# Altium PCB door_lock_pcb.PcbDoc
Units mil, origin at the board's own origin, x right, y up, seen from the top; angles counter-clockwise.
Board outline 6000 x 4000 mil, 2 copper layers (Top Layer, Bottom Layer); 31 components, 30 nets, 105 pads, 0 vias.
Unrouted connection lines stored in the file: 72.
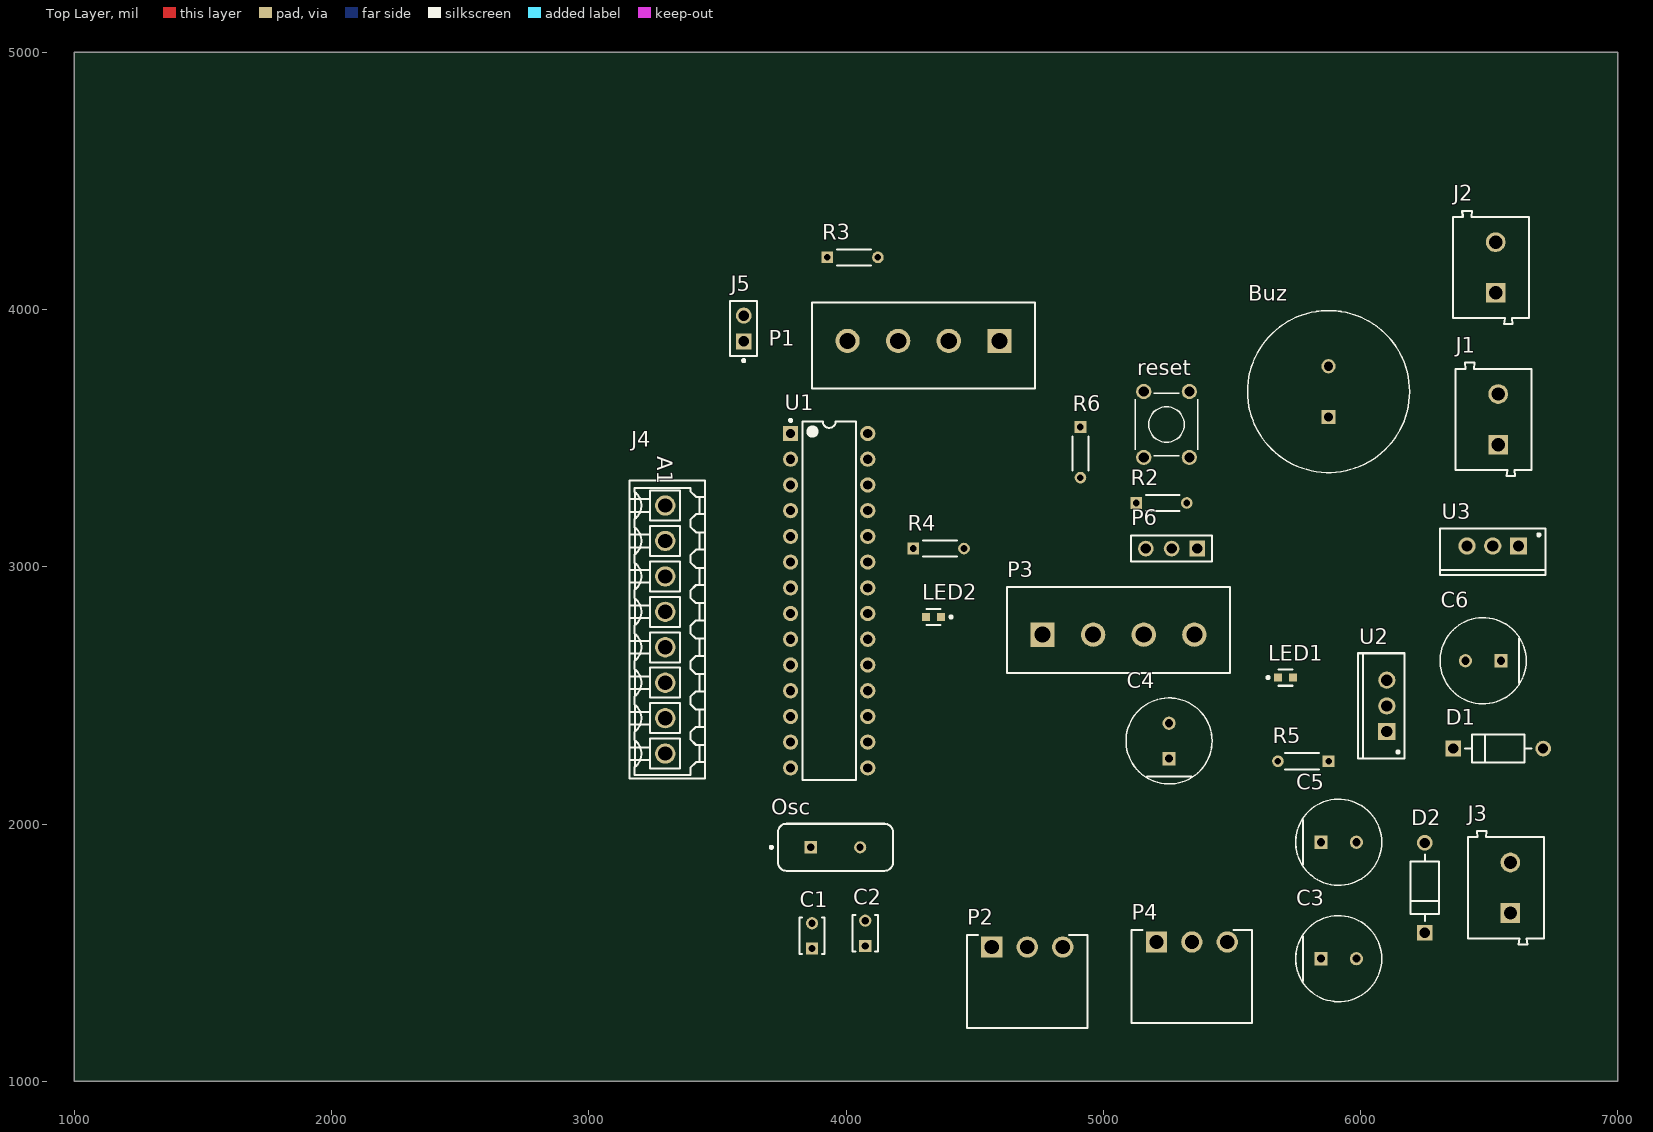
[diagram p0: Top Layer view]
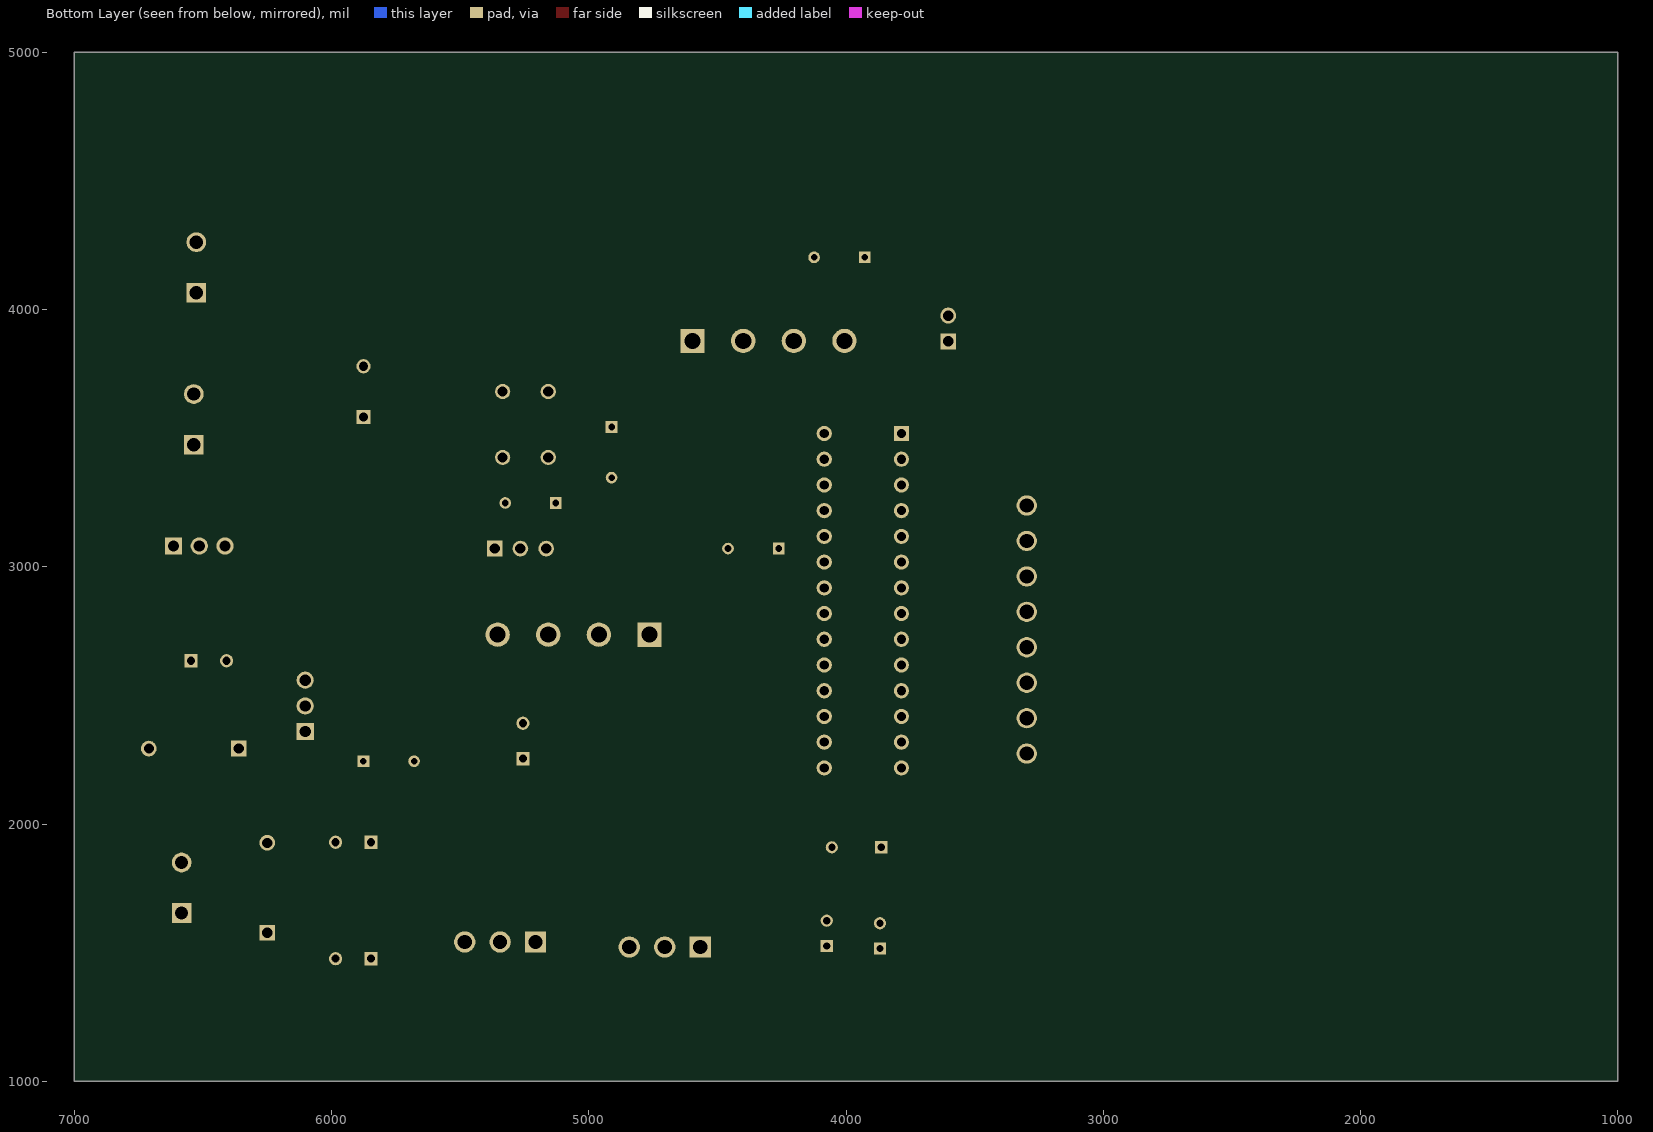
[diagram p1: Bottom Layer view, seen from below]

## Layer stack, top to bottom
Top Solder: solder mask 0.4, Solder Resist, Dk 3.5
Top Layer: signal copper 1.4
Dielectric 1: dielectric 12.6, FR-4, Dk 4.8
Bottom Layer: signal copper 1.4
Bottom Solder: solder mask 0.4, Solder Resist, Dk 3.5

## Board outline
1000,1000 7000,1000 7000,5000 1000,5000

## Design rules (kind name [scope] priority, off if disabled: settings)
Clearance [All] p1: gap=10 ignorepadtopadclearanceinfootprint=FALSE except(0: Arc-Hole Track-Hole SMDPad-Hole THPad-Hole Via-Hole Fill-Hole Poly-Hole Region-Hole Text-Hole)
PolygonConnect [All] p1: connectstyle=Relief reliefconductorwidth=10 reliefentries=4 polygonreliefangle="90 Angle" airgapwidth=10
RoutingVias [All] p1: holewidth=28 width=50 viastyle="Through Hole" minholewidth=28 minwidth=50 maxholewidth=28 maxwidth=50
SolderMaskExpansion [All] p1: expansion=4 istentingtop=FALSE
Width [All] p1: maxlimit=10 minlimit=10 preferedwidth=10
30 further rules are at their usual default settings.

## Components (designator, comment, footprint, x,y, rotation, side; value= is the part's Value field where it differs from the comment)
Buz "SD1614TT-B3M" FP-SD1614TT-B3M-MFG 5875.98,3681.1 r0 top
C1 "RCE5C2A220J0DBH03A" FP-RCE0DB-MFG 3868.11,1564.96 r90 top
C2 "RCE5C2A220J0DBH03A" FP-RCE0DB-MFG 4074.8,1574.8 r90 top
C3 "EEUFC1V151" FP-RAD-TH-D_8_0_5-L_11_5-MFG 5915.35,1476.38 r0 top
C4 "EEUFC1V151" FP-RAD-TH-D_8_0_5-L_11_5-MFG 5255.91,2322.83 r90 top
C5 "EEUFC1V151" FP-RAD-TH-D_8_0_5-L_11_5-MFG 5915.35,1929.13 r0 top
C6 "EEUFC1V151" FP-RAD-TH-D_8_0_5-L_11_5-MFG 6477.05,2634.61 r180 top
D1 "1N4007" FP-1N4007-MFG 6535.43,2293.31 r0 top value=15pF
D2 "1N4007" FP-1N4007-MFG 6250,1751.97 r90 top value=15pF
J1 "691102710002" 691102710002 6517.72,3572.83 r90 top
J2 "691102710002" 691102710002 6507.87,4163.39 r90 top
J3 "691102710002" 691102710002 6564.96,1751.97 r90 top
J4 "1842380000" SL_SMT_3_5_180G_08 3305.91,2755.91 r270 top
J5 "TSW-102-07-F-S" FP-TSW-102-07-F-S-MFG 3602.36,3926.38 r90 top
LED1 "LG L29K-G2J1-24-Z" FP-LG_L29K-MFG 5708.66,2568.9 r0 top
LED2 "LG L29K-G2J1-24-Z" FP-LG_L29K-MFG 4340.55,2805.12 r180 top
Osc "FOXSLF/160-20" FOX-FOXSLF160-20 3959.06,1909.45 r0 top
P1 "691311700104" 691311700104 4301.18,3860.24 r180 top
P2 "691322110003" 691322110003 4704.72,1387.8 r0 top
P3 "691311700104" 691311700104 5059.06,2753.94 r0 top
P4 "691322110003" 691322110003 5344.49,1407.48 r0 top
P6 "TSW-103-07-G-S" SMTC-TSW-103-07-X-S 5365.75,3070.87 r180 top
R2 "MRS16000C2002FCT00" FP-MRS1600-MFG 5226.38,3248.03 r0 top
R3 "MRS16000C2002FCT00" FP-MRS1600-MFG 4025.59,4202.76 r0 top
R4 "MRS16000C2002FCT00" FP-MRS1600-MFG 4360.24,3070.87 r0 top
R5 "MRS16000C2002FCT00" FP-MRS1600-MFG 5777.56,2244.09 r180 top
R6 "MRS16000C2002FCT00" FP-MRS1600-MFG 4911.42,3444.88 r270 top
reset "430156043726" 430156043726 5246.06,3553.15 r90 top
U1 "ATmega328-PU" 28P3 3934.65,2868.11 r0 top
U2 "L7805CV" TO220 6102.36,2459.05 r90 top
U3 "L7805CV" TO220 6514.17,3080.71 r180 top

## Footprints (in the part's own frame and the unit in brackets; to place one, negate y for a bottom-side part, rotate by r counter-clockwise, add the part's x,y. Pads: shape width x height; smd on the part's side, far side on the other; paste and mask are expansions set on the pad)
28P3 [mm] "28-Pin Plastic Dual In-Line Package (PDIP)"
  rect 1.5x1.5 hole 0.9: 1(-3.81,16.51)
  round 1.5 hole 0.9: 2(-3.81,13.97) 3(-3.81,11.43) 4(-3.81,8.89) 5(-3.81,6.35) 6(-3.81,3.81) 7(-3.81,1.27) 8(-3.81,-1.27) 9(-3.81,-3.81) 10(-3.81,-6.35) 11(-3.81,-8.89) 12(-3.81,-11.43) 13(-3.81,-13.97) 14(-3.81,-16.51) 15(3.81,-16.51) 16(3.81,-13.97) 17(3.81,-11.43) 18(3.81,-8.89) 19(3.81,-6.35) 20(3.81,-3.81) 21(3.81,-1.27) 22(3.81,1.27) 23(3.81,3.81) 24(3.81,6.35) 25(3.81,8.89) 26(3.81,11.43) 27(3.81,13.97) 28(3.81,16.51)
  silkscreen extent -3.93,-17.7 2.65,17.93, body extent -3.6,-17.65 3.6,17.65, height 4.58
430156043726 [mm] "6*6mm vertical type, THT, height 4.3mm, white actuator, 260gf, Bulk"
  round 1.5 hole 1: 1(-3.25,2.25) 2(-3.25,-2.25) 3(3.25,2.25) 4(3.25,-2.25)
  silkscreen extent -3.1,-3.1 3.1,3.1, body extent -3.95,-3.1 3.95,3.1, height 4.31
691102710002 [mm] "5,00mm - modular - blue - Horizontal entry with pressure clamp - 9,9 mm height - 02p"
  rect 1.95x1.95 hole 1.3: 1(-2.5,-0.45)
  round 1.95 hole 1.3: 2(2.5,-0.45)
  silkscreen extent -5.6,-3.75 5.6,3.75, body extent -5.6,-3.75 5.6,3.75, height 9.96
691311700104 [mm] "5.00mm - PCB Vertical Closed - 04p"
  rect 2.4x2.4 hole 1.6: 1(-7.5,-0.45)
  round 2.4 hole 1.6: 2(-2.5,-0.45) 3(2.5,-0.45) 4(7.5,-0.45)
  silkscreen extent -11,-4.25 11,4.25, body extent -11,-4.25 11,4.25, height 12.1
691322110003 [mm] "Horizontal PCB Header, pitch 3.5mm, 03p"
  rect 2.1x2.1 hole 1.4: 1(-3.5,3.4)
  round 2.1 hole 1.4: 2(0,3.4) 3(3.5,3.4)
  silkscreen extent -5.95,-4.6 5.95,4.6, body extent -5.95,-4.6 5.95,4.6, height 7.3
FOX-FOXSLF160-20 [mm] "THD, 2-Leads, Body 11.35x4.65mm"
  rect 1.2x1.2 hole 0.7: 1(-2.44,0)
  round 1.2 hole 0.7: 2(2.44,0)
  silkscreen extent -6.45,-2.32 5.68,2.32, body extent -5.67,-2.32 5.68,2.33, height 3.6
FP-1N4007-MFG [mm]
  rect 1.55x1.55 hole 1 paste-1000 mask+0: 1(-4.44,0)
  round 1.55 hole 1 paste-1000 mask+0: 2(4.44,0)
  silkscreen extent -3.26,-1.4 3.26,1.4, body extent -5.32,-1.5 5.32,1.5, height 0.25
FP-LG_L29K-MFG [mm]
  rect 0.8x0.8 smd paste-1000 mask+0: 1(-0.75,0) 2(0.75,0)
  silkscreen extent -1.85,-0.8 0.7,0.8, body extent -0.85,-0.4 0.85,0.4, height 0.67
FP-MRS1600-MFG [mm]
  rect 1.15x1.15 hole 0.65 paste-1000 mask+0: 1(-2.5,0)
  round 1.15 hole 0.65 paste-1000 mask+0: 2(2.5,0)
  silkscreen extent -1.55,-0.8 1.8,0.8, body extent -3.17,-0.9 3.17,0.9, height 0.25
FP-RAD-TH-D_8_0_5-L_11_5-MFG [mm]
  rect 1.3x1.3 hole 0.8 paste-1000 mask+0: 1(-1.75,0)
  round 1.3 hole 0.8 paste-1000 mask+0: 2(1.75,0)
  silkscreen extent -4.25,-4.25 4.25,4.25, body extent -4.35,-4.35 4.35,4.35, height 0.25
FP-RCE0DB-MFG [mm]
  rect 1.2x1.2 hole 0.7 paste-1000 mask+0: 1(-1.25,0)
  round 1.2 hole 0.7 paste-1000 mask+0: 2(1.25,0)
  silkscreen extent -1.8,-1.25 1.8,1.25, body extent -1.95,-1.35 1.95,1.35, height 0.25
FP-SD1614TT-B3M-MFG [mm]
  rect 1.4x1.4 hole 0.9 paste-1000 mask+0: 1(0,-2.5)
  round 1.4 hole 0.9 paste-1000 mask+0: 2(0,2.5)
  silkscreen extent -8,-8 8,8, body extent -8.1,-8.1 8.1,8.1, height 0.25
FP-TSW-102-07-F-S-MFG [mm]
  rect 1.57x1.57 hole 1.02 paste-1000 mask+0: 1(-1.27,0)
  round 1.57 hole 1.02 paste-1000 mask+0: 2(1.27,0)
  silkscreen extent -3.3,-1.34 2.73,1.34, body extent -2.83,-1.44 2.83,1.44, height 0.25
SL_SMT_3_5_180G_08 [mm] "OMNIMATE Signal - Serie BL/SL 3.50  SL-SMT 3.50/08/180G 1.5"
  round 2 hole 1.4: A1(-12.25,-0.22) A2(-8.75,-0.22) A3(-5.25,-0.22) A4(-1.75,-0.22) A5(1.75,-0.22) A6(5.25,-0.22) A7(8.75,-0.22) A8(12.25,-0.22)
  silkscreen extent -14.7,-3.73 14.7,3.73, body extent -14.7,-3.72 14.7,3.73, height 11.06
SMTC-TSW-103-07-X-S [mm] ".025 SQ Post Terminal Strip Assembly, 1x3 Pins, Vertical, 2.54mm Pitch, Male"
  rect 1.55x1.55 hole 1.02: 1(0,0)
  round 1.55 hole 1.02: 2(2.54,0) 3(5.08,0)
  silkscreen extent -1.46,-1.27 6.54,1.27, body extent -1.27,-1.27 6.35,1.27, height 8.38
TO220 [mm] "TO, Thru-Hole, Vertical, Heatsink Mounted; 3 In-Line Leads; Pitch 2.54 mm"
  rect 1.7x1.7 hole 1.1: 1(-2.54,0)
  round 1.7 hole 1.1: 2(0,0) 3(2.54,0)
  silkscreen extent -5.2,-1.75 5.2,2.85, body extent -5.25,-1.8 5.25,2.9, height 19.7

## Part data
Buz: library part CMP-08413-000011-1, "AUDIO MAGNETIC XDCR 6-16V TH", Frequency=2.048kHz, Max Operating Temperature=85°C, Max Supply Current=100mA, Min Operating Temperature=-40°C, Operating Supply Voltage=15V, Package Quantity=240, Voltage Rating=12V, Diameter=16mm, Height=11mm, Height - Seated (Max)=0.551inch, Lead Free="Lead Free", Mount="Through Hole", Operating Supply Current=100mA, Packaging=Bulk, Sensing Method=Magnetic, Series=SD, Termination="PC Pins", Washable=No
C1 C2: library part CMP-06035-047347-1, "Cap Ceramic 22pF 100V C0G ±5% Radial 2.5mm +125°C Ammo Pack", Capacitance=22pF, Case/Package=Radial, Dielectric=C0G, Max Operating Temperature=125°C, Min Operating Temperature=-55°C, Package Quantity=2000, Ratings=AEC-Q200, Resistor Type=Ceramic, Tolerance=5%, Voltage=100V, Depth=2.5mm, Height=3.5mm, Height - Seated (Max)=0.138inch, Lead Diameter=0.5mm, Lead Pitch=0.098inch, Lead/Base Style=Straight, Length=3.6mm, Mount="Through Hole", Packaging="Tape and Reel", Termination=Radial, Voltage Rating=100V, Voltage Rating (DC)=100V, Width=0.098inch
C3 C5: library part CMP-05427-001656-1, "Aluminum Electrolytic Capacitors (Radial Lead Type) AEC-Q200 Qualified 150uF ±20% 35V", Capacitance=1uF, Case/Package=Radial, Dielectric Material=Aluminium, ESR (Equivalent Series Resistance)=117mR, Leakage Current=3uA, Max Operating Temperature=105°C, Min Operating Temperature=-55°C, Package Quantity=200, Ratings=AEC-Q200, Ripple Current=555mA, Tolerance=20%, Voltage=35V, Construction=RADIAL, Contact Plating=Tin, Diameter=8mm, Height=11.5mm, Height - Seated (Max)=0.453inch, Impedance=117mR, Lead Diameter=0.6mm, Lead Free="Lead Free", Lead Pitch=3.5mm, Length=11mm, Life (Hours)=2000Hour, Mount="Through Hole", Packaging=Bulk, Polarity=Polar, Radiation Hardening=No, REACH SVHC="No SVHC", RoHS Compliant=Yes, Series=FC, Size=11.5mm, Termination=Radial, Voltage Rating=35V, Voltage Rating (DC)=35V
C4 C6: library part CMP-05427-001656-1, "Aluminum Electrolytic Capacitors (Radial Lead Type) AEC-Q200 Qualified 150uF ±20% 35V", Capacitance=10uF, Case/Package=Radial, Dielectric Material=Aluminium, ESR (Equivalent Series Resistance)=117mR, Leakage Current=3uA, Max Operating Temperature=105°C, Min Operating Temperature=-55°C, Package Quantity=200, Ratings=AEC-Q200, Ripple Current=555mA, Tolerance=20%, Voltage=35V, Construction=RADIAL, Contact Plating=Tin, Diameter=8mm, Height=11.5mm, Height - Seated (Max)=0.453inch, Impedance=117mR, Lead Diameter=0.6mm, Lead Free="Lead Free", Lead Pitch=3.5mm, Length=11mm, Life (Hours)=2000Hour, Mount="Through Hole", Packaging=Bulk, Polarity=Polar, Radiation Hardening=No, REACH SVHC="No SVHC", RoHS Compliant=Yes, Series=FC, Size=11.5mm, Termination=Radial, Voltage Rating=35V, Voltage Rating (DC)=35V
D1 D2: library part CMP-123542-000001-1, "Rectifier diode 1000 V 1 A DO-41, ,", Capacitance=15pF, Forward Current=1A, Manufacturer=Diotec, Max Junction Temp=+175°C, Max Repetitive Reverse Voltage=1000V, Max Surge Forward Current=27A, Peak Reverse Current=5uA, Temperature="-50°C to +175°C", Temperature Range Low=-50°C, Automotive=No, Category=Diode, ComponentLink2Description=Datasheet, ComponentLink2URL=https://datasheet.octopart.com/1N4007-Diotec-datasheet-62346875.pdf, Device Class L1="Discrete Semiconductors", Device Class L2=Diodes, Device Class L3="Rectifier Diodes", Height=2.8mm, Ipc Land Pattern Name=DIOAD888W100L520D280, Lead Free=Yes, Manufacturer Part Number=1N4007, Octopart=https://octopart.com/1n4007-diotec-4040411, Package=1N4007, Reverse Voltage=1000V, RoHS=TRUE, Temperature Range High=+175°C
J1 J2 J3: library part CMP-1502-03258-1, "Series 102 - 5.00 mm Horizontal Entry Modular with Pressure Clamp WR-TBL, 2 pin", Manufacturer="Wurth Elektronik", Operating Temperature=-40to105degC, Datasheet URL=http://katalog.we-online.de/em/datasheet/6911027100xx.pdf, Manufacturer URL=http://www.we-online.de, Mounting Technology=THT, Package Reference=691102710002, Packaging=Box, Part Number=691102710002, Pin Number=2, Pitch=5.00mm, Publisher=WurthElektronik
J4: library part CMP-1559-01143-1, "OMNIMATE Signal - series BL/SL 3.50", Colour=Black, Manufacturer=Weidmueller, Rated_current_min_no_of_poles_TU_20_deg_C="15 A", Rated_current_use_group_B_UL_1059="10 A", Rated_voltage_for_surge_voltage_class_pollution_degree_II_2="320 V", Rated_voltage_use_group_B_UL_1059="300 V", UL_94_flammability_rating=V-0, ComponentLink1Description="Manufacturer URL", ComponentLink1URL=http://www.weidmueller.com/, ComponentLink2Description="URL Link1", ComponentLink2URL=http://catalog.weidmueller.com/catalog/Start.do?localeId=en&ObjectID=1842380000, Contact_surface=tinned, Insulating_material="LCP GF", Mounting_onto_the_PCB="Reflow solder connection", No_of_poles=8, Outgoing_elbow=180°, PackageReference=SL_SMT_3_5_180G_08, Packaging=Box, PartNumber=1842380000, Pitch_inch="0.138 inch", Pitch_mm="3.5 mm", Qty="50 PCS", Revision=V1, Short_text_for_material="SL-SMT 3.50/08/180G 3.2SN BK BX", Side_termination_characteristic="closed side", Solder_pin_length_mm="3.2 mm"
J5: library part CMP-02766-001458-1, "CONN HEADER VERT 2POS 2.54MM", Color=Black, Flammability Rating="UL94 V-0", Max Current Rating=7.6A, Max Operating Temperature=125°C, Max Voltage Rating (AC)=550V, Min Operating Temperature=-55°C, Package Quantity=1, Connector Type=Header, Contact Finish - Mating=GOLD, Contact Material=Bronze, Contact Mating Length=0.23inch, Contact Plating=Gold, Contact Shape=Square, Contact Type="Male Pin", Depth=2.54mm, Fastening Type=Pull, Gender=Male, Housing Color=Black, Housing Material=Polyester, Insulation Color=Black, Insulation Material=PBT, Length=5.08mm, Mount="Through Hole", Number of Contacts=2, Number of Positions=2, Number of Rows=1, Orientation=Straight, Packaging=Bulk, Pitch=2.54mm, Radiation Hardening=No, REACH SVHC="No SVHC", RoHS Compliant=Yes, Series=TSW, Termination=Solder
LED1 LED2: library part CMP-62016-000024-1, "LED GREEN DIFFUSED 0603 SMD", Case Code (Imperial)=0603, Case Code (Metric)=1608, Color=Green, Forward Current=20mA, Forward Voltage=2.2V, Lens Color=White, Max Operating Temperature=100°C, Min Operating Temperature=-40°C, Package Quantity=5000, Reverse Voltage=12V, Test Current=2mA, Case/Package=0603, Depth=0.8mm, Dominant Wavelength=570nm, Height=0.65mm, Illumination Color=Green, Length=1.3mm, Lens Size=0.8mm, Lens Style=Flat, Lens Transparency=Diffused, Luminous Flux=0.012lm, Luminous Intensity=5.6mcd, Mount="Surface Mount", Number of Elements=1, Number of LEDs=1, Number of Pins=2, Packaging="Tape and Reel", Radiation Hardening=No, Viewing Angle=160°, Width=0.8mm
Osc: library part CMP-1749-00003-1, "Resistance Weld Thru-Hole Crystal, 16 MHz, -20 to 70 degC, 2-Pin THD, RoHS, Bulk", Case\Package=Axial, Max Operating Temperature="155 degC", Min Operating Temperature="-55 degC", Package Quantity=200, Power Rating="250 mW", Resistance="221 kohm", Tolerance=1%, Voltage Rating="250 V", ComponentLink1Description="Manufacturer URL", ComponentLink1URL=http://www.foxonline.com/, ComponentLink2Description=Datasheet, ComponentLink2URL=http://www.foxonline.com/pdfs/hc49slf.pdf, DatasheetVersion=Mar-15, Length="0.248 inch", Mount="Through Hole", PackageDescription="2-Pin Through Hole Device, Body 11.35 x 4.65 mm", PackageReference=FOXSLF160-20, Packaging=Bulk, RoHSCompliant=true
P1 P3: library part CMP-1502-02035-1, "Serie 3117 - 5.00mm Close Vertical PCB Header WR-TBL, 4 pin", Manufacturer="Wurth Elektronik", Operating Temperature=-40to105degC, Datasheet URL=http://katalog.we-online.de/em/datasheet/6913117001xx.pdf, Gender=Male, Manufacturer URL=http://www.we-online.de, Mounting Technology=THT, Package Reference=691311700104, Packaging=Box, Part Number=691311700104, Pin Number=4, Pitch=5.00mm, Publisher=WurthElektronik
P2 P4: library part CMP-1502-01792-1, "Serie 3221 - 3.50mm Horizontal PCB Header WR-TBL, 3 pin", Manufacturer="Wurth Elektronik", Operating Temperature=-40to105degC, Datasheet URL=http://katalog.we-online.de/em/datasheet/6913221100xx.pdf, Gender=Male, Manufacturer URL=http://www.we-online.de, Mounting Technology=THT, Package Reference=691322110003, Packaging=Box, Part Number=691322110003, Pin Number=3, Pitch=3.50mm, Publisher=WurthElektronik
P6: library part CMP-1024-00333-1, "0.025\" SQ Post Header, Through-hole, Vertical, -55 to 125 degC, 2.54 mm Pitch, 3-Pin, Male, RoHS", Manufacturer=Samtec, Temperature Range="-55 to 125 degC", ComponentLink1Description="Manufacturer URL", ComponentLink1URL=http://www.samtec.com, ComponentLink2Description=Datasheet, ComponentLink2URL=http://www.samtec.com/documents/webfiles/pdf/TSW_TH.PDF, ComponentLink3Description="Package Specification", ComponentLink3URL=http://www.samtec.com/documents/webfiles/cpdf/TSW-XXX-XX-XXX-X-XX-XXX-MKT.pdf, DatasheetVersion=F-214, Mounting Technology=Through-hole, Orientation=Vertical, PackageDescription=".025[0.64] SQ. Post Terminal Strip Assembly", PackageReference=TSW-103-07-X-S, PackageVersion="DM, 8/1988", PartNumber=TSW-103-07-G-S, Pitch="2.54 mm", RoHS=True
R2 R3: library part CMP-02408-000019-1, "RES 20K OHM 0.4W 1% AXIAL", Case/Package=Conformal, Max Operating Temperature=155°C, Max Power Dissipation=400mW, Min Operating Temperature=-55°C, Resistance=10k, Resistor Type="Metal Film", Temperature Coefficient=50ppm/°C, Tolerance=1%, Construction=Cylindrical, Contact Plating=Tin, Diameter=1.6mm, Length=3.6mm, Military Standard=Not, Mount="Through Hole", Number of Terminations=2, Packaging="Tape and Reel", Power Rating=400mW, Radiation Hardening=No, RoHS Compliant=Yes, Series=MRS16, Technology="THIN FILM", Termination=Axial
R4 R5 R6: library part CMP-02408-000019-1, "RES 20K OHM 0.4W 1% AXIAL", Case/Package=Conformal, Max Operating Temperature=155°C, Max Power Dissipation=400mW, Min Operating Temperature=-55°C, Resistance=1k, Resistor Type="Metal Film", Temperature Coefficient=50ppm/°C, Tolerance=1%, Construction=Cylindrical, Contact Plating=Tin, Diameter=1.6mm, Length=3.6mm, Military Standard=Not, Mount="Through Hole", Number of Terminations=2, Packaging="Tape and Reel", Power Rating=400mW, Radiation Hardening=No, RoHS Compliant=Yes, Series=MRS16, Technology="THIN FILM", Termination=Axial
reset: library part CMP-1453-00001-1, "WS-TATV THT Tact Switch 6X6 mm", Manufacturer="Wuerth Elektronik", ComponentLink1Description="Manufacturer URL", ComponentLink1URL=http://www.we-online.com, ComponentLink2Description=Datasheet, ComponentLink2URL=http://katalog.we-online.de/em/datasheet/4301x6.pdf, NoPins=04, PackageReference=430156043726, PartNumber=430156043726
U1: library part CMP-0095-00015-2, "8-bit AVR Microcontroller, 32KB Flash, 1KB EEPROM, 2KB SRAM, 28-pin PDIP, Industrial Grade (-40°C to 85°C)", ComponentLink1Description="Manufacturer URL", ComponentLink1URL=http://www.atmel.com/, ComponentLink2Description="ATmega48A/48PA/88A/88PA/168A/168PA/328/328P Datasheet", ComponentLink2URL=http://www.atmel.com/dyn/resources/prod_documents/8271.pdf, ComponentLink3Description="ATmega48A/48PA/88A/88PA/168A/168PA/328/328P Summary", ComponentLink3URL=http://www.atmel.com/dyn/resources/prod_documents/8271S.pdf, DatasheetVersion="revD, May-2011", PackageDescription="28-lead (0.300\"/7.62mm Wide) Plastic Dual Inline Package (PDIP)", PackageReference=28P3, PackageVersion="revB, Sep-2001", RevisionNote="DatasheetVersion updated. URLs added."
U2 U3: library part CMP-0244-00483-1, "Positive Voltage Regulator, 5V, 3-Pin TO-220", ComponentLink1Description="Manufacturer URL", ComponentLink1URL=http://www.st.com, ComponentLink2Description=Datasheet, ComponentLink2URL=http://www.st.com/internet/com/TECHNICAL_RESOURCES/TECHNICAL_LITERATURE/DATASHEET/CD00000444.pdf, ComponentLink3Description="Package Specification", ComponentLink3URL=http://www.st.com/internet/com/TECHNICAL_RESOURCES/TECHNICAL_LITERATURE/PACKAGE_INFORMATION/CD00004649.pdf, DatasheetVersion=16/11/2011, PackageDescription="TO, Thru-Hole, Vertical, Heatsink Mounted; 3 In-Line Leads; Pitch 2.54 mm", PackageReference=TO220, PackageVersion=ver3.0

## Nets (pads, with @x,y where several pads share a name; then routed paths per layer and width w, separated by ;. In a path a pad name is that pad's centre, name@x,y a point inside that pad or via, vN(x,y) a via of type N, cw(c..) or ccw(c..) an arc to the next point about the centre after c; other vN are vias at no path point)
GND: Buz.2 C1.2 C2.2 C3.1 C4.1 C5.1 C6.1 J1.1 J2.1 J3.1 J5.1 P1.4 P2.1 P3.3 P4.1 P6.3 R4.1 R5.1 reset.2 reset.4 U1.8 U1.22 U2.2 U3.2
NetBuz_1: Buz.1 R6.1
NetC1_1: C1.1 Osc.1 U1.10
NetC2_1: C2.1 Osc.2 U1.9
NetC3_2: C3.2 D1.1 D2.1 U2.1
NetC5_2: C5.2 D1.2 J1.2 U3.1
NetC6_2: C6.2 J2.2 U3.3
NetD2_2: D2.2 J3.2
NetJ4_A1: J4.A1 U1.4
NetJ4_A2: J4.A2 U1.5
NetJ4_A3: J4.A3 U1.6
NetJ4_A4: J4.A4 U1.11
NetJ4_A5: J4.A5 U1.12
NetJ4_A6: J4.A6 U1.13
NetJ4_A7: J4.A7 U1.23
NetJ4_A8: J4.A8 U1.24
NetJ5_2: J5.2 R3.1 U1.18
NetLED1_1: LED1.1 R5.2
NetLED2_1: LED2.1 R4.2
NetLED2_2: LED2.2 U1.19
NetP1_1: P1.1 U1.27
NetP1_2: P1.2 U1.28
NetP2_2: P2.2 U1.14
NetP3_1: P3.1 U1.16
NetP3_2: P3.2 U1.15
NetP4_2: P4.2 U1.17
NetP6_2: P6.2 U1.25
NetR2_1: R2.1 reset.1 reset.3 U1.1
NetR6_2: R6.2 U1.26
VCC: C4.2 LED1.2 P1.3 P2.3 P3.4 P4.3 P6.1 R2.2 R3.2 U1.7 U1.20 U2.3
pads on no net: U1.2 U1.3 U1.21

## Text inside footprints (layer, text, board x,y; h text height)
J4: Top Overlay "A1" at 3266.54,3429.13 h59.06 r270